# EAGLE board PCF8575C_v10 Indivdual (EAGLE 7.1.0)
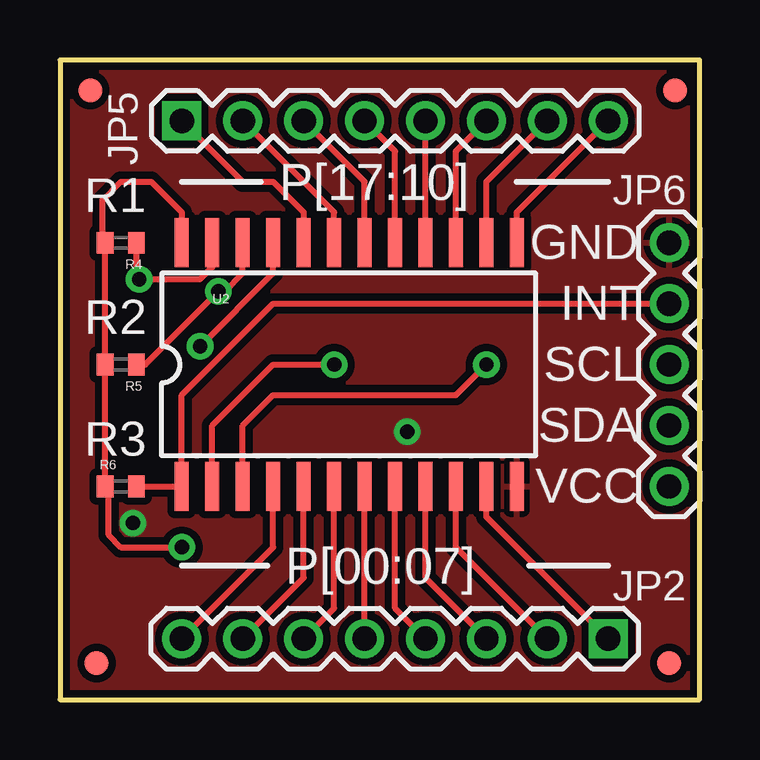
[diagram p0: board, top side]
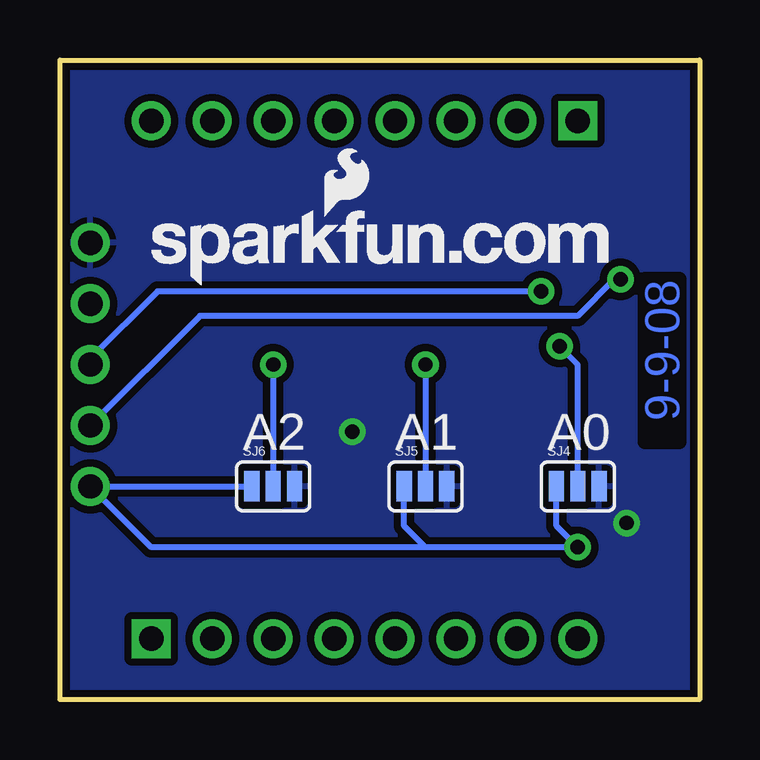
[diagram p1: board, bottom side, seen from below]

Size 26.67 x 26.67 mm. Coordinates in mm from the lower left corner, seen from the top.
Outline: 0,0 26.67,0 26.67,26.67 0,26.67 0,0
Copper layers (1*16): Top 0.0356mm / dielectric 1.5011mm / Bottom 0.0356mm
Design rules "default *": minimum track width 8mil, minimum drill 20mil, track to track 8mil, track to pad 8mil, pad to pad 8mil, via to via 8mil, smd to smd 8mil, copper to edge 10mil, drill to drill 8mil, minimum pad ring 12mil, minimum via ring 10mil, stop-mask expansion 4mil, vias tented up to drill 24mil, thermal gap 10mil

## Footprints (pad centres in the part's own frame; a part is rotated, then mirrored left to right if it is on the bottom)
FIDUCIAL-1X2 = smd 1 x 1: 1 0,0
1X08 = drill 1.016 square: 1 0,0 | drill 1.016: 2 2.54,0; 3 5.08,0; 4 7.62,0; 5 10.16,0; 6 12.7,0; 7 15.24,0; 8 17.78,0
1X05 = drill 1.016: 1 0,0; 2 2.54,0; 3 5.08,0; 4 7.62,0; 5 10.16,0
C0402 = smd 0.7 x 0.9: 1 -0.65,0; 2 0.65,0
SJ_3 = smd 0.635 x 1.27: 1 -0.889,0; 2 0,0; 3 0.889,0
SO-24DW = smd 0.584 x 2.032: 1 -6.35,-5.08; 2 -5.08,-5.08; 3 -3.81,-5.08; 4 -2.54,-5.08; 5 -1.27,-5.08; 6 0,-5.08; 7 1.27,-5.08; 8 2.54,-5.08; 9 3.81,-5.08; 10 5.08,-5.08; 11 6.35,-5.08; 12 7.62,-5.08; 13 7.62,5.08; 14 6.35,5.08; 15 5.08,5.08; 16 3.81,5.08; 17 2.54,5.08; 18 1.27,5.08; 19 0,5.08; 20 -1.27,5.08; 21 -2.54,5.08; 22 -3.81,5.08; 23 -5.08,5.08; 24 -6.35,5.08

## Placement (x,y rotation side)
E$5  [FIDUCIAL-1X2]  1.27,25.4 0 top
E$6  [FIDUCIAL-1X2]  25.65,25.4 0 top
E$7  [FIDUCIAL-1X2]  1.52,1.52 0 top
E$8  [FIDUCIAL-1X2]  25.4,1.52 0 top
JP2  [1X08]  22.86,2.54 180 top
JP5  [1X08]  5.08,24.13 0 top
JP6  [1X05]  25.4,19.05 270 top
R4  [C0402]  2.54,19.05 180 top
R5  [C0402]  2.54,13.97 180 top
R6  [C0402]  2.54,8.89 0 top
SJ4  A0  [SJ_3]  5.08,8.89 0 bottom
SJ5  A1  [SJ_3]  11.43,8.89 0 bottom
SJ6  A2  [SJ_3]  17.78,8.89 0 bottom
U2  PCF8575C  [SO-24DW]  11.43,13.97 0 top
U$1  LOGO-SFENEW  [SFE-NEW-WEBLOGO]  22.86,17.27 0 bottom

## Library data of the parts
E$5-E$8 JP2 JP5 JP6 R4-R6 SJ4-SJ6 U2 U$1 = SparkFun

## Nets
A3: SJ4.2 U2.21
A4: SJ5.2 U2.2
A5: SJ6.2 U2.3
GND1: JP6.1 SJ4.3 SJ5.3 SJ6.3 U2.12
INT1: JP6.2 R6.2 U2.1
P1: JP5.1 U2.20
P2: JP5.2 U2.19
P3: JP5.3 U2.18
P4: JP5.4 U2.17
P5: JP5.5 U2.16
P6: JP5.6 U2.15
P7: JP5.7 U2.14
P8: JP5.8 U2.13
PO8: JP2.8 U2.4
PO9: JP2.7 U2.5
PO10: JP2.5 U2.7
PO11: JP2.4 U2.8
PO12: JP2.3 U2.9
PO13: JP2.2 U2.10
PO14: JP2.1 U2.11
PO15: JP2.6 U2.6
SCL1: JP6.3 R5.1 U2.22
SDA1: JP6.4 R4.1 U2.23
VCC1: JP6.5 R4.2 R5.2 R6.1 SJ4.1 SJ5.1 SJ6.1 U2.24

## Tracks (layer width: path | path; a pad name or v marks a point on that pad's centre or on a via)
A3  (via drill 0.6)
  Top 0.254: U2.21 8.89,17.78 v5.84,14.73
  Bottom 0.254: SJ4.2 5.08,13.97 v5.84,14.73
A4  (via drill 0.6)
  Top 0.254: v11.43,13.97 8.89,13.97 6.35,11.43 U2.2
  Bottom 0.254: v11.43,13.97 SJ5.2
A5  (via drill 0.6)
  Top 0.254: v17.78,13.97 16.51,12.7 8.89,12.7 7.62,11.43 U2.3
  Bottom 0.254: v17.78,13.97 SJ6.2
GND1  (via drill 0.6)
  other vias: 14.48,11.18 3.05,7.37
  pour Top (isolate 0.305): 0,26.67 0,0 26.67,0 26.67,26.67
  pour Bottom (isolate 0.305): 0,26.67 0,0 26.67,0 26.67,26.67
INT1
  Top 0.254: R6.2 U2.1 5.08,12.7 8.89,16.51 JP6.2
P1
  Top 0.254: U2.20 10.16,20.32 8.89,21.59 7.62,21.59 JP5.1
P2
  Top 0.254: U2.19 11.43,20.32 JP5.2
P3
  Top 0.254: U2.18 12.7,21.59 JP5.3
P4
  Top 0.254: U2.17 13.97,22.86 JP5.4
P5
  Top 0.254: U2.16 JP5.5
P6
  Top 0.254: U2.15 16.51,22.86 JP5.6
P7
  Top 0.254: U2.14 17.78,21.59 JP5.7
P8
  Top 0.254: U2.13 19.05,20.32 JP5.8
PO8
  Top 0.254: U2.4 8.89,6.35 JP2.8
PO9
  Top 0.254: U2.5 10.16,5.08 JP2.7
PO10
  Top 0.254: JP2.5 U2.7
PO11
  Top 0.254: U2.8 13.97,3.81 JP2.4
PO12
  Top 0.254: U2.9 15.24,5.08 JP2.3
PO13
  Top 0.254: U2.10 16.51,6.35 JP2.2
PO14
  Top 0.254: U2.11 17.78,7.62 JP2.1
PO15
  Top 0.254: U2.6 11.43,3.81 JP2.6
SCL1  (via drill 0.6)
  Top 0.254: R5.1 3.56,13.97 v6.6,17.02 6.86,17.02 7.62,17.78 U2.22
  Bottom 0.254: JP6.3 25.4,14.22 22.61,17.02 v6.6,17.02
SDA1  (via drill 0.6)
  Top 0.254: R4.1 3.19,17.64 v3.3,17.53 5.84,17.53 6.35,18.03 U2.23
  Bottom 0.254: JP6.4 20.83,16 5.08,16 3.56,17.53 v3.3,17.53
VCC1  (via drill 0.6)
  Top 0.254: 2.03,8.89 R6.1 | 2.03,8.89 1.89,9.03 R5.2 1.78,13.97 1.89,14.08 R4.2 1.78,19.05 1.78,20.83 2.54,21.59 3.81,21.59 5.08,20.32 U2.24 | 2.03,8.89 2.03,6.86 2.54,6.35 v5.08,6.35
  Bottom 0.254: SJ6.1 JP6.5 22.86,6.35 11.43,6.35 | SJ4.1 5.97,7.24 v5.08,6.35 11.43,6.35 | SJ5.1 12.32,7.24 11.43,6.35

## Text on the board
Bottom: 9-9-08
tPlace: P[17:10] | R1 | GND | INT | R2 | SCL | SDA | R3 | VCC | P[00:07]
bPlace: A0 | A1 | A2